# Allegro board EVAL-LTC7890-AZ-REVC.brd
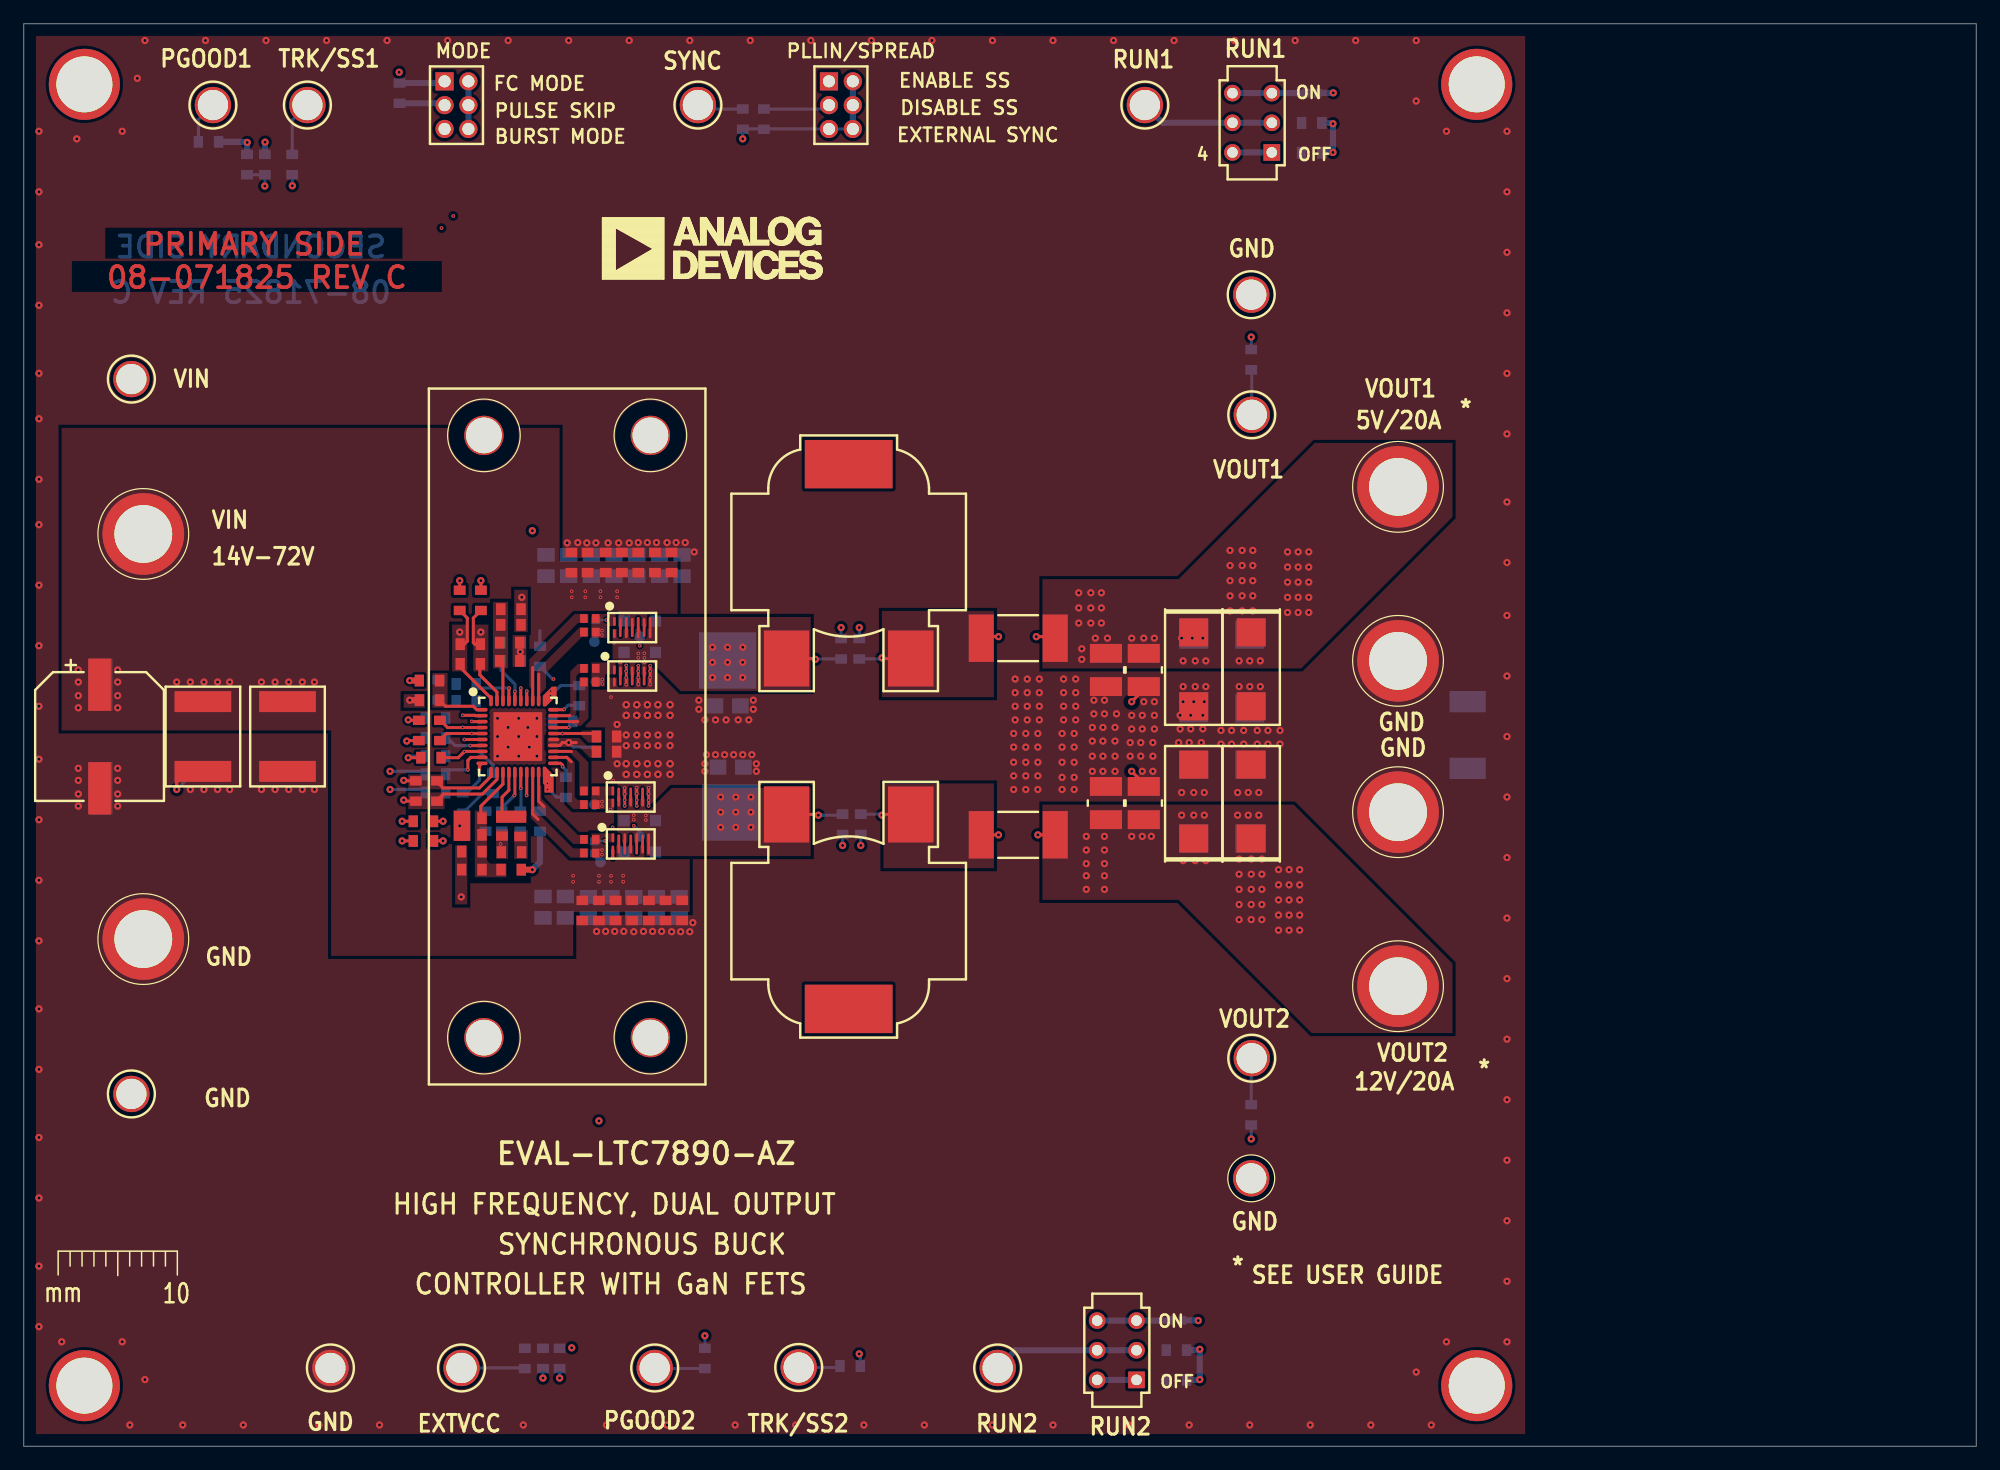
[diagram p0: board, top side]
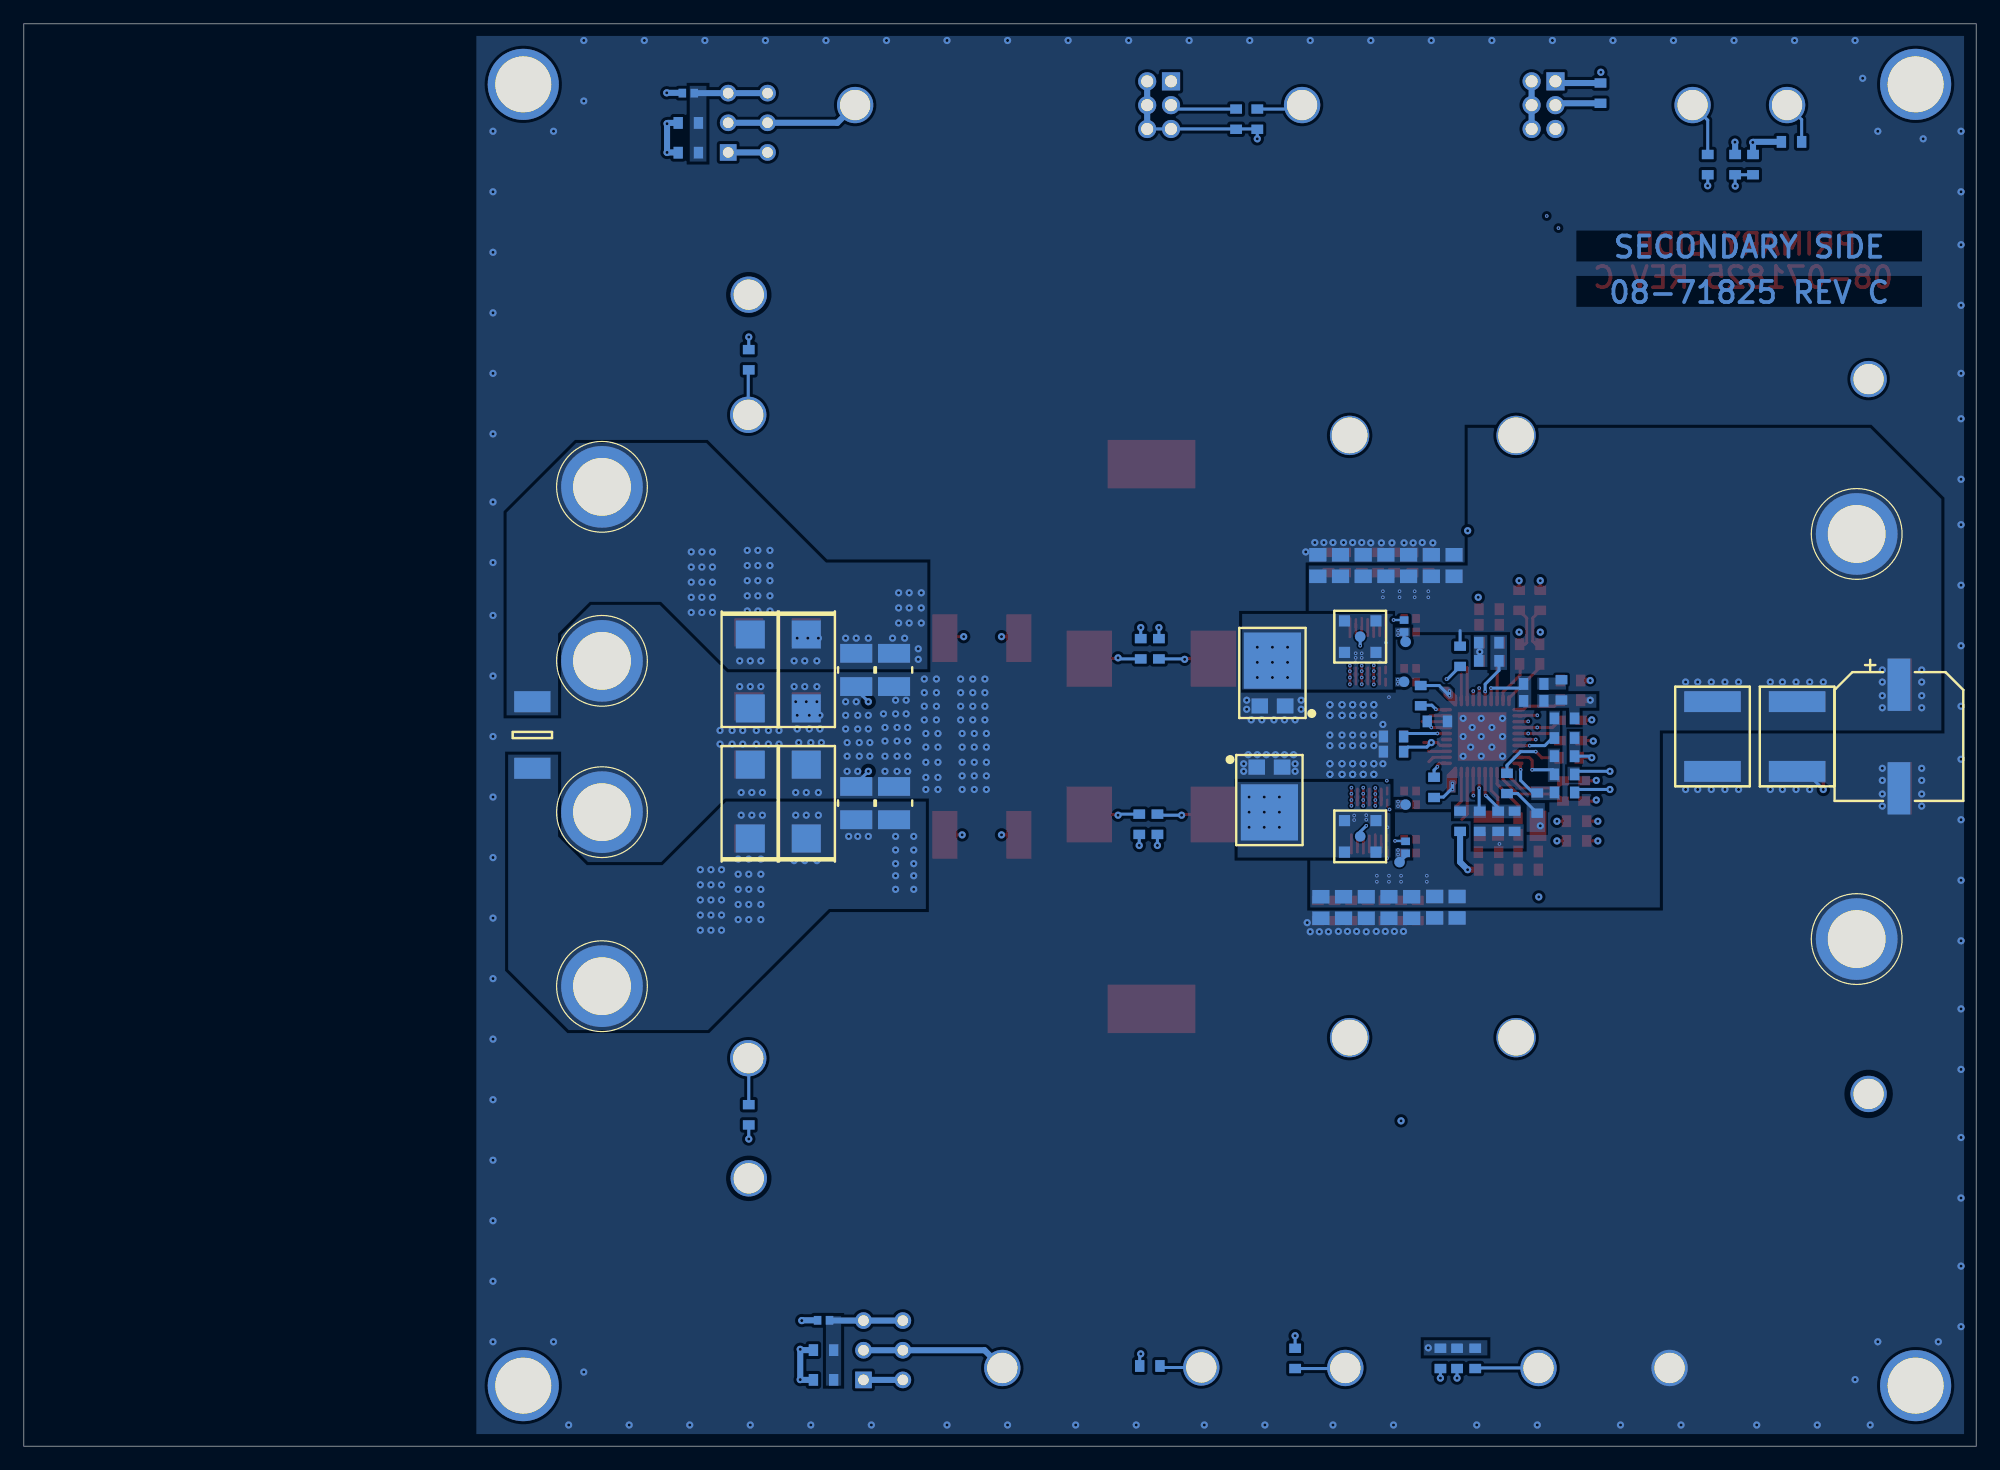
[diagram p1: board, bottom side, seen from below]

Outline 163.83 x 119.38 mm; copper layers: TOP, LAYER_2, LAYER_3, LAYER_4, LAYER_5, BOTTOM. Coordinates in mm from the lower left corner of the outline.
Outline path: 0,119.38 0,0 163.83,0 163.83,119.38 0,119.38

## Design rules (mm)
constraint set DEFAULT: min track width 0.254

## Placement (name value [footprint] x y rotation side)
C1  4.7uF  [C0603]  48.9 58.29 0 bottom
C2  0.1uF  [C0603]  48.9 58.29 0 top
C3  0.1uF  [C0603]  46.61 62.99 270 bottom
C4  0.1uF  [C0603]  45.49 55.3 270 bottom
C5  1000pF  [C0603]  34.67 54.99 90 top
C6  TBD0603  [C0603]  40.87 68.94 180 top
C7  1000pF  [C0603]  37.47 65.66 0 top
C8  TBD0603  [C0603]  40.77 65.91 0 top
C9  TBD0603  [C0603]  37.59 49.91 0 top
C10  100pF  [C0603]  37.12 62.55 0 bottom
C11  100pF  [C0603]  40.12 52.06 270 top
C12  3300pF  [C0603]  40.92 49.86 180 top
C13  TBD0603  [C0603]  37.59 52.71 180 top
C14  6800pF  [C0603]  37.12 63.98 0 bottom
C15  0.1uF  [C0603]  40.11 52.45 270 bottom
C16  TBD0603  [C0603]  62.1 111.38 90 bottom
C17  0.1uF  [C0603]  40.89 67.44 0 bottom
C20  100pF  [C0603]  96.72 5.56 180 bottom
C23  1uF  [C0603]  48.9 59.56 180 top
C24  100pF  [C0603]  108.07 108.56 180 bottom
C25  0.1uF  [C0603]  45.21 60.83 180 bottom
C26  0.22uF  [C0603]  46.86 44.96 270 top
C27  0.1uF  [C0603]  48.26 44.96 270 top
C28  0.22uF  [C0603]  49.66 44.96 270 top
C29  0.22uF  [C0603]  51.05 44.96 270 top
C30  0.22uF  [C0603]  52.45 44.96 270 top
C31  0.22uF  [C0603]  53.85 44.96 270 top
C32  0.22uF  [C0603]  55.24 44.96 270 top
C33  0.22uF  [C0603]  45.95 74.17 90 top
C34  0.22uF  [C0603]  47.31 74.17 90 top
C35  0.22uF  [C0603]  48.83 74.17 90 top
C36  0.22uF  [C0603]  50.19 74.17 90 top
C37  0.22uF  [C0603]  51.56 74.17 90 top
C38  0.22uF  [C0603]  52.96 74.17 90 top
C39  0.22uF  [C0603]  54.36 74.17 90 top
CIN1  56UF  [CPLSMSQ406H500]  6.35 59.56 270 top
CIN2  56UF  [CPLSMSQ406H500]  6.48 59.56 270 bottom
CIN3  22uF  [CAPSML256W217H217]  15.03 59.56 270 top
CIN4  22uF  [CAPSML256W217H217]  22.13 59.56 270 top
CIN5  22uF  [CAPSML256W217H217]  15.03 59.56 270 bottom
CIN6  22uF  [CAPSML256W217H217]  22.13 59.56 270 bottom
CIN7  TBD0805  [C0805]  43.56 45.24 270 bottom
CIN8  TBD0805  [C0805]  45.44 45.24 270 bottom
CIN9  1uF  [C0805]  47.37 45.21 270 bottom
CIN10  1uF  [C0805]  49.28 45.21 270 bottom
CIN11  1uF  [C0805]  51.18 45.21 270 bottom
CIN12  TBD0805  [C0805]  53.09 45.21 270 bottom
CIN13  TBD0805  [C0805]  54.99 45.21 270 bottom
CIN14  TBD0805  [C0805]  43.81 73.91 90 bottom
CIN15  TBD0805  [C0805]  45.72 73.91 90 bottom
CIN16  1uF  [C0805]  47.62 73.91 90 bottom
CIN17  1uF  [C0805]  49.53 73.91 90 bottom
CIN18  1uF  [C0805]  51.44 73.91 90 bottom
CIN19  TBD0805  [C0805]  53.34 73.91 90 bottom
CIN20  TBD0805  [C0805]  55.24 73.91 90 bottom
COUT1  22uF  [C1210-2]  90.81 65.15 270 top
COUT2  22uF  [C1210-2]  93.98 65.15 270 top
COUT3  150UF  [C7343-31]  98.17 65.2 270 top
COUT4  150UF  [C7343-31]  103 65.2 270 top
COUT5  22uF  [C1210-2]  90.81 53.98 90 top
COUT6  22uF  [C1210-2]  93.98 53.98 90 top
COUT7  150UF  [C7343-31]  98.17 54.1 90 top
COUT8  150UF  [C7343-31]  103 54.1 90 top
COUT9  150UF  [C7343-31]  98.17 65.02 270 bottom
COUT10  150UF  [C7343-31]  102.87 65.02 270 bottom
COUT11  22uF  [C1210-2]  93.98 65.15 270 bottom
COUT12  22uF  [C1210-2]  90.81 65.15 270 bottom
COUT13  150UF  [C7343-31]  98.17 54.1 90 bottom
COUT14  22uF  [C1210-2]  93.98 53.98 90 bottom
COUT15  150UF  [C7343-31]  102.87 54.1 90 bottom
COUT18  22uF  [C1210-2]  90.81 53.98 90 bottom
D1  SS10PH10-M3/86A  [TO-277A]  59.05 64.9 90 bottom
D2  SS10PH10-M3/86A  [TO-277A]  59.31 54.23 270 bottom
E1  2501-2-00-80-00-00-07-0  [CNMILLMAX2501]  52.94 6.56 0 top
E2  2501-2-00-80-00-00-07-0  [CNMILLMAX2501]  15.87 112.56 0 top
E3  2501-2-00-80-00-00-07-0  [CNMILLMAX2501]  9.03 89.56 0 top
E4  2501-2-00-80-00-00-07-0  [CNMILLMAX2501]  9.03 29.56 0 top
E5  2501-2-00-80-00-00-07-0  [CNMILLMAX2501]  103.04 32.56 0 top
E6  2501-2-00-80-00-00-07-0  [CNMILLMAX2501]  103.04 86.56 270 top
E7  2501-2-00-80-00-00-07-0  [CNMILLMAX2501]  103 22.48 0 top
E8  2501-2-00-80-00-00-07-0  [CNMILLMAX2501]  103 96.65 270 top
E9  2501-2-00-80-00-00-07-0  [CNMILLMAX2501]  65.02 6.6 0 top
E10  2501-2-00-80-00-00-07-0  [CNMILLMAX2501]  56.57 112.56 0 top
E11  2501-2-00-80-00-00-07-0  [CNMILLMAX2501]  23.8 112.56 0 top
E12  2501-2-00-80-00-00-07-0  [CNMILLMAX2501]  36.73 6.56 0 top
E13  2501-2-00-80-00-00-07-0  [CNMILLMAX2501]  25.73 6.56 0 top
E16  2501-2-00-80-00-00-07-0  [CNMILLMAX2501]  94.07 112.56 180 top
E17  2501-2-00-80-00-00-07-0  [CNMILLMAX2501]  81.72 6.56 0 top
J1  KFH-032-10ET  [CNPEMKFH-032]  10.03 76.56 0 top
J2  KFH-032-10ET  [CNPEMKFH-032]  10.03 42.56 0 top
J3  KFH-032-10ET  [CNPEMKFH-032]  115.32 38.61 0 top
J4  KFH-032-10ET  [CNPEMKFH-032]  115.32 53.21 0 top
J5  KFH-032-10ET  [CNPEMKFH-032]  115.32 80.52 270 top
J6  KFH-032-10ET  [CNPEMKFH-032]  115.32 65.91 270 top
J10  0734152063  [CNSMASQ136H203]  51.69 67.95 180 bottom
J11  0734152063  [CNSMASQ136H203]  51.69 51.18 180 bottom
L1  2UH  [LSML755W365H420]  69.22 75.06 0 top
L2  2UH  [LSML755W365H420]  69.22 44.07 180 top
NOREF  -  [unnamed]  5.08 114.3 0 top
NOREF#2  -  [#2]  81.15 139.7 0 top
NOREF#3  -  [#2]  212.09 315.59 0 top
NOREF#4  -  [#2]  140.21 305.56 0 top
NOREF#5  -  [unnamed]  121.92 114.3 0 top
NOREF#6  -  [#2]  307.98 172.97 0 top
NOREF#7  -  [#2]  0.89 95.02 270 top
NOREF#8  -  [unnamed]  5.08 5.08 0 top
NOREF#9  -  [#2]  0 0 0 top
NOREF#10  -  [#2]  -49.02 -68.07 0 top
NOREF#11  -  [#2]  78.19 123.69 0 top
NOREF#12  -  [#2]  15.37 -21.46 0 top
NOREF#13  -  [#2]  -124.71 -186.82 0 top
NOREF#14  -  [#2]  300.95 236.48 0 top
NOREF#15  -  [#2]  -12.57 115.44 0 top
NOREF#16  -  [#2]  0 0 90 top
NOREF#17  -  [#2]  131.93 308.2 0 top
NOREF#18  -  [#2]  150.24 -6.98 0 top
NOREF#19  -  [#2]  34.11 -27.73 0 top
NOREF#20  -  [#2]  -165.25 -186.59 0 top
NOREF#21  -  [#2]  159.77 116.01 0 top
NOREF#22  -  [unnamed]  121.92 5.08 0 top
P1  TMM-103-02-L-D  [CNTHMHDR2X3L236W155H225]  35.31 114.55 270 top
P3  TMM-103-02-L-D  [CNTHMHDR2X3L236W155H225]  67.56 114.55 270 top
P10  9774010243R  [CNWURTH9774010243R]  52.58 84.84 0 top
P11  9774010243R  [CNWURTH9774010243R]  38.61 84.84 0 top
P12  9774010243R  [CNWURTH9774010243R]  52.58 34.29 0 top
P13  9774010243R  [CNWURTH9774010243R]  38.61 34.29 0 top
Q1  EPC2218  [DIE8_3_5X1_95_A]  51.05 68.71 0 top
Q2  EPC2218  [DIE8_3_5X1_95_A]  51.05 64.64 0 top
Q3  EPC2218  [DIE8_3_5X1_95_A]  50.92 54.48 0 top
Q4  EPC2218  [DIE8_3_5X1_95_A]  50.93 50.55 0 top
R1  1MEG  [R0603]  57.15 7.37 270 bottom
R2  0  [R0603]  43.31 66.29 270 bottom
R3  0  [R0603]  39.37 55.63 270 bottom
R5  1MEG  [R0603]  15.49 109.47 180 bottom
R6  1.2  [R0402]  47.5 69.47 180 top
R7  2.2  [R0402]  47.5 49.78 0 top
R8  1  [R0402]  47.5 68.33 180 top
R9  1  [R0402]  47.5 50.93 0 top
R10  TBD0402  [R0402]  48.01 68.83 90 bottom
R12  10  [R0603]  103 27.81 270 bottom
R13  1  [R0402]  47.5 64.14 180 top
R14  1  [R0402]  47.5 54.99 0 top
R15  1  [R0402]  47.5 65.28 180 top
R16  1  [R0402]  47.5 53.85 0 top
R17  10  [R0603]  103 91.19 90 bottom
R18  0  [R0603]  40.87 70.24 180 top
R19  TBD0603  [R0603]  40.77 67.44 0 top
R20  3.01K  [R0603]  34.8 63.48 90 bottom
R21  5.9K  [R0603]  41.66 52.02 270 top
R22  TBD0603  [R0603]  40.89 48.39 0 top
R23  1.4MEG  [R0603]  37.59 48.39 0 top
R24  10  [R0603]  33.53 50.8 0 top
R25  0  [R0603]  33.53 52.45 0 top
R26  TBD0603  [R0603]  68.71 52.2 270 bottom
R27  TBD0603  [R0603]  70.23 52.2 270 bottom
R28  0  [R0603]  36.58 70.99 270 top
R29  20  [R0603]  38.35 70.99 270 top
R30  TBD0603  [R0603]  70.1 66.93 90 bottom
R31  TBD0603  [R0603]  68.58 66.93 90 bottom
R32  100K  [R0603]  37.59 51.31 180 top
R33  TBD0603  [R0603]  32.89 54.99 90 top
R34  TBD0603  [R0603]  37.47 67.31 180 top
R36  0  [R0603]  34.54 57.91 180 bottom
R37  75K  [R0603]  34.04 62.61 0 top
R38  TBD0603  [R0603]  34.04 64.26 180 top
R39  TBD0402  [R0402]  47.88 50.27 90 bottom
R40  TBD0603  [R0603]  34.54 56.39 180 bottom
R41  0  [R0603]  34.54 54.86 180 bottom
R42  TBD0603  [R0603]  36.83 53.98 270 bottom
R43  0  [R0603]  20.23 107.56 90 bottom
R45  TBD0603  [R0603]  34.16 57.79 180 top
R46  TBD0603  [R0603]  48.9 59.56 0 bottom
R47  TBD0603  [R0603]  34.54 59.44 180 bottom
R48  0  [R0603]  34.54 61.09 180 bottom
R49  1K  [R0603]  60.33 111.38 270 bottom
R50  0  [R0603]  69.34 6.73 180 bottom
R51  TBD0603  [R0603]  38.73 52.45 270 bottom
R52  0  [R0603]  22.53 107.56 270 bottom
R53  TBD0603  [R0603]  40.89 65.91 0 bottom
R56  1MEG  [R0402]  96.72 10.56 0 bottom
R57  100K  [R0603]  31.53 113.56 270 bottom
R58  TBD0603  [R0603]  96.72 8.06 0 bottom
R59  0  [R0603]  43.56 7.37 90 bottom
R60  TBD0603  [R0603]  44.96 7.37 90 bottom
R61  TBD0603  [R0603]  42.04 7.37 270 bottom
R62  1MEG  [R0402]  108.07 113.56 180 bottom
R63  TBD0603  [R0603]  108.07 111.06 0 bottom
R66  TBD0603  [R0603]  34.92 60.07 270 top
R67  TBD_SPACER_2512  [R2512]  121.16 59.69 270 bottom
R68  TBD0603  [R0603]  33.15 60.07 270 top
R71  TBD0603  [R0603]  43.31 52.45 90 bottom
R72  TBD0603  [R0603]  41.66 52.45 90 bottom
R74  TBD0603  [R0603]  18.73 107.56 90 bottom
RS1  0.0015  [R2512H35]  83.44 67.82 180 top
RS2  0.0015  [R2512H35]  83.44 51.31 0 top
S1  JS202011CQN  [SWTHL354W142H217]  104.72 108.59 90 top
S2  JS202011CQN  [SWTHL354W142H217]  93.37 5.56 90 top
TP1  TESTPAD  [TPSMC40]  48.01 64.16 180 bottom
TP2  TESTPAD  [TPSMC40]  47.88 67.51 180 bottom
TP3  TESTPAD  [TPSMC40]  48.39 49.02 180 bottom
TP4  TESTPAD  [TPSMC40]  47.88 53.85 180 bottom
U1  LTC7890RUJM#PBF  [QFN40_6X6_PAD4_1X4_1_05-08-1681]  41.45 59.56 270 top

## Library data of the parts
C1 = CAP: Tolerance: 10; User Part Number: UPN; alternate symbols: (C0603); part number: CAP_SM-4.7UF,25V,10,E035948,C0603; tolerance: 10
C2-C4 C15 C17 = CAP: Tolerance: 10; User Part Number: UPN; alternate symbols: (C0603); part number: CAP_SM-0.1UF,25V,10,E013746,C0603; tolerance: 10
C5 C7 = CAP: Tolerance: 10; User Part Number: UPN; alternate symbols: (C0603); part number: CAP_SM-1000PF,25V,10,E042649,C0603; tolerance: 10
C6 C8 C9 C13 C16 = CAP: User Part Number: UPN; alternate symbols: (C0603); part number: CAP_SM-TBD0603,TBD0603,TBD0603,E000382,C0603
C10 C20 C24 = CAP: Tolerance: 10; User Part Number: UPN; alternate symbols: (C0603); part number: CAP_SM-100PF,50V,10,E024743,C0603; tolerance: 10
C11 = CAP: Tolerance: 10; User Part Number: UPN; alternate symbols: (C0603); part number: CAP_SM-100PF,50V,10,E013802,C0603; tolerance: 10
C12 = CAP: Tolerance: 10; User Part Number: UPN; alternate symbols: (C0603); part number: CAP_SM-3300PF,50V,10,E019647,C0603; tolerance: 10
C14 = CAP: Tolerance: 10; User Part Number: UPN; alternate symbols: (C0603); part number: CAP_SM-6800PF,50V,10,E007966,C0603; tolerance: 10
C23 = CAP: Tolerance: 10; User Part Number: UPN; alternate symbols: (C0603); part number: CAP_SM-1UF,25V,10,E033832,C0603; tolerance: 10
C25 C27 = CAP: Tolerance: 10; User Part Number: UPN; alternate symbols: (C0603); part number: CAP_SM-0.1UF,100V,10,E024908,C0603; tolerance: 10
C26 C28-C39 = CAP: Tolerance: 10; User Part Number: UPN; alternate symbols: (C0603); part number: CAP_SM-0.22UF,100V,10,E031432,C0603; tolerance: 10
CIN1 CIN2 = CAPP: Tolerance: 20; User Part Number: UPN; alternate symbols: (CPLSMSQ406H500); part number: CAPP_SM-56UF,80V,20,E062303,CPLSMSQ406H500; tolerance: 20
CIN3-CIN6 = CAP: Tolerance: 20; User Part Number: UPN; alternate symbols: (CAPSML256W217H217); part number: CAP_SM-22UF,100V,20,E026779,CAPSML256W217H217; tolerance: 20
CIN7 CIN8 CIN12-CIN15 CIN19 CIN20 = CAP: User Part Number: UPN; alternate symbols: (C0805); part number: CAP_SM-TBD0805,TBD0805,TBD0805,E000383,C0805
CIN9-CIN11 CIN16-CIN18 = CAP: User Part Number: UPN; Tolerance: 10; alternate symbols: (C0805); part number: CAP_SM-1UF,100V,10,E014208,C0805; tolerance: 10
COUT1 COUT2 COUT5 COUT6 COUT11 COUT12 COUT14 COUT18 = CAP: Tolerance: 10; User Part Number: UPN; alternate symbols: (C1210-2); part number: CAP_SM-22UF,16V,10,E011548,C1210-2; tolerance: 10
COUT3 COUT4 COUT7-COUT10 COUT13 COUT15 = CAPP: Tolerance: 20; User Part Number: UPN; alternate symbols: (C7343-31); part number: CAPP_SM-150UF,16V,20,E046068,C7343-31; tolerance: 20
D1 D2 = DIO3P_V7: User Part Number: UPN; Tolerance: N/A; alternate symbols: (TO-277A); part number: DIO3P_V7_SM-SS10PH10-M3/86A,100V,N/A,E057759,TO-277A; tolerance: N/A
E1-E13 E16 E17 = CNTP1P: User Part Number: UPN; Tolerance: N/A; alternate symbols: (CNMILLMAX2501); part number: CNTP1P_TH-2501-2-00-80-00-00-07-0,E031108,CNMILLMAX2501; tolerance: N/A
J1-J6 = CN1P: User Part Number: UPN; Tolerance: N/A; alternate symbols: (CNPEMKFH-032); part number: CN1P_TH-KFH-032-10ET,E039893,CNPEMKFH-032; tolerance: N/A
J10 J11 = CNBNC5P: Tolerance: N/A; User Part Number: UPN; alternate symbols: (CNSMASQ136H203); part number: CNBNC5P_SM-0734152063,E050157,CNSMASQ136H203; tolerance: N/A
L1 L2 = IND: User Part Number: UPN; Tolerance: 20; alternate symbols: (LSML755W365H420); part number: IND_SM-2UH,20,E047808,LSML755W365H420; tolerance: 20
P1 P3 = CN6P_ODD_EVEN: User Part Number: UPN; Tolerance: N/A; alternate symbols: (CNTHMHDR2X3L236W155H225); part number: CN6P_ODD_EVEN_TH-TMM-103-02-L-D,E043044,CNTHMHDR2X3L236W155H225; tolerance: N/A
P10-P13 = CN1P: Tolerance: N/A; User Part Number: UPN; alternate symbols: (CNWURTH9774010243R); part number: CN1P_TH-9774010243R,E060235,CNWURTH9774010243R; tolerance: N/A
Q1-Q4 = TRANNGANFET8P: Tolerance: N/A; User Part Number: UPN; alternate symbols: (DIE8_3_5X1_95_A); part number: TRANNGANFET8P_SM-EPC2218,E058016,DIE8_3_5X1_95_A; tolerance: N/A
R1 R5 = RES: User Part Number: UPN; Tolerance: 5; alternate symbols: (R0603); part number: RES_SM-1MEG,E027219,1/10W,5,R0603; tolerance: 5
R2 R3 R18 R25 R28 R36 R41 R43 R48 R50 R52 R59 = RES: User Part Number: UPN; Tolerance: JUMPER; alternate symbols: (R0603); part number: RES_SM-0,E007502,1/10W,JUMPER,R0603; tolerance: JUMPER
R6 = RES: User Part Number: UPN; Tolerance: 1; alternate symbols: (R0402); part number: RES_SM-1.2,E041546,1/16W,1,R0402; tolerance: 1
R7 = RES: User Part Number: UPN; Tolerance: 5; alternate symbols: (R0402); part number: RES_SM-2.2,E045373,1/16W,5,R0402; tolerance: 5
R8 R9 R13-R16 = RES: User Part Number: UPN; Tolerance: 5; alternate symbols: (R0402); part number: RES_SM-1,E019639,1/16W,5,R0402; tolerance: 5
R10 R39 = RES: User Part Number: UPN; alternate symbols: (R0402); part number: RES_SM-TBD0402,E004049,TBD0402,TBD0402,R0402
R12 = RES: User Part Number: UPN; Tolerance: 1; alternate symbols: (R0603); part number: RES_SM-10,E030868,1/10W,1,R0603; tolerance: 1
R17 R24 = RES: User Part Number: UPN; Tolerance: 1; alternate symbols: (R0603); part number: RES_SM-10,E003666,1/10W,1,R0603; tolerance: 1
R19 R22 R26 R27 R30 R31 R33 R34 R38 R40 R42 R45-R47 R51 R53 R58 R60 R61 R63 R66 R68 R71 R72 R74 = RES: User Part Number: UPN; alternate symbols: (R0603); part number: RES_SM-TBD0603,E004050,TBD0603,TBD0603,R0603
R20 = RES: User Part Number: UPN; Tolerance: 0.1; alternate symbols: (R0603); part number: RES_SM-3.01K,E019212,1/16W,0.1,R0603; tolerance: 0.1
R21 = RES: User Part Number: UPN; Tolerance: 1; alternate symbols: (R0603); part number: RES_SM-5.9K,E028374,1/10W,1,R0603; tolerance: 1
R23 = RES: User Part Number: UPN; Tolerance: 1; alternate symbols: (R0603); part number: RES_SM-1.4MEG,E024301,1/10W,1,R0603; tolerance: 1
R29 = RES: User Part Number: UPN; Tolerance: 1; alternate symbols: (R0603); part number: RES_SM-20,E032358,1/10W,1,R0603; tolerance: 1
R32 = RES: User Part Number: UPN; Tolerance: 1; alternate symbols: (R0603); part number: RES_SM-100K,E030871,1/10W,1,R0603; tolerance: 1
R37 = RES: User Part Number: UPN; Tolerance: 1; alternate symbols: (R0603); part number: RES_SM-75K,E012707,1/10W,1,R0603; tolerance: 1
R49 = RES: User Part Number: UPN; Tolerance: 1; alternate symbols: (R0603); part number: RES_SM-1K,E003678,1/10W,1,R0603; tolerance: 1
R56 R62 = RES: User Part Number: UPN; Tolerance: 1; alternate symbols: (R0402); part number: RES_SM-1MEG,E003749,1/10W,1,R0402; tolerance: 1
R57 = RES: User Part Number: UPN; Tolerance: 1; alternate symbols: (R0603); part number: RES_SM-100K,E010279,1/10W,1,R0603; tolerance: 1
R67 = RES: Tolerance: N/A; User Part Number: UPN; alternate symbols: (R2512); part number: RES_SM-TBD_SPACER_2512,E011817,N/A,N/A,R2512; tolerance: N/A
RS1 RS2 = RES: User Part Number: UPN; Tolerance: 1; alternate symbols: (R2512H35); part number: RES_SM-0.0015,E047480,3W,1,R2512H35; tolerance: 1
S1 S2 = SWDPDT_V5: Tolerance: N/A; User Part Number: UPN; alternate symbols: (SWTHL354W142H217); part number: SWDPDT_V5_TH-JS202011CQN,E025828,SWTHL354W142H217; tolerance: N/A
TP1-TP4 = NCTESTPAD: Tolerance: N/A; User Part Number: UPN; alternate symbols: (TPSMC40); part number: NCTESTPAD_SM-TESTPAD,E019801,TPSMC40; tolerance: N/A
U1 = ADLTC7890: User Part Number: UPN; Tolerance: N/A; alternate symbols: (QFN40_6X6_PAD4_1X4_1_05-08-1681); part number: ADLTC7890_SM-LTC7890RUJM#PBF,E057724,QFN40_6X6_PAD4_1X4_1_05-08-1681; tolerance: N/A

## Footprints (pads in the part's own frame, mm; a bottom-side part is the same pattern mirrored in y, then rotated)
C0603
  rect 0.787x0.991 smd: 1(-0.85,0) 2(0.85,0)
C0805
  rect 1.143x1.448 smd: 1(-0.9,0) 2(0.9,0)
C1210-2
  rect 1.575x2.692 smd: 1(-1.397,0) 2(1.397,0)
C7343-31
  rect 2.362x2.438 smd: N(3.1,0) P(-3.1,0)
CAPSML256W217H217
  rect 1.753x4.75 smd: 1(-2.926,0) 2(2.926,0)
CNMILLMAX2501
  round 3.048 hole 2.54: 1(0,0)
CNPEMKFH-032
  round 6.858 hole 4.851: 1(0,0)
CNSMASQ136H203
  round 0.889 smd: 1(0,0)
  rect 0.94x0.94 smd: 2(-1.32,-1.32) 3(1.32,-1.32) 4(1.32,1.32) 5(-1.32,1.32)
CNTHMHDR2X3L236W155H225
  rect 1.524x1.524 hole 1.016: 1(0,0)
  round 1.524 hole 1.016: 2(0,2) 3(2,0) 4(2,2) 5(4,0) 6(4,2)
CNWURTH9774010243R
  round 3.302 hole 2.997 unplated: (0,0)
  round 0 smd: 1(0,0)
CPLSMSQ406H500
  rect 4.394x1.905 smd: N(4.347,0) P(-4.347,0)
DIE8_3_5X1_95_A
  oval 0.229x0.762 smd: 1(-1.5,0.513) 2(-1.5,-0.513)
  oval 0.229x1.6 smd: 3(-1,0) 5(0,0) 7(1,0)
  oval 0.229x1.778 smd: 4(-0.5,0) 6(0.5,0) 8(1.5,0)
LSML755W365H420
  rect 7.366x4.064 smd: (0,7.366)
  rect 3.81x4.699 smd: 1(-5.207,-8.954) 2(5.207,-8.954)
QFN40_6X6_PAD4_1X4_1_05-08-1681
  oval 0.305x0.94 smd: 1(-2.25,-3.005) 2(-1.75,-3.005) 3(-1.25,-3.005) 4(-0.75,-3.005) 5(-0.25,-3.005) 6(0.25,-3.005) 7(0.75,-3.005) 8(1.25,-3.005) 9(1.75,-3.005) 10(2.25,-3.005) 21(2.25,3.005) 22(1.75,3.005) 23(1.25,3.005) 24(0.75,3.005) 25(0.25,3.005) 26(-0.25,3.005) 27(-0.75,3.005) 28(-1.25,3.005) 29(-1.75,3.005) 30(-2.25,3.005)
  oval 0.94x0.305 smd: 11(3.005,-2.25) 12(3.005,-1.75) 13(3.005,-1.25) 14(3.005,-0.75) 15(3.005,-0.25) 16(3.005,0.25) 17(3.005,0.75) 18(3.005,1.25) 19(3.005,1.75) 20(3.005,2.25) 31(-3.005,2.25) 32(-3.005,1.75) 33(-3.005,1.25) 34(-3.005,0.75) 35(-3.005,0.25) 36(-3.005,-0.25) 37(-3.005,-0.75) 38(-3.005,-1.25) 39(-3.005,-1.75) 40(-3.005,-2.25)
  rect 4.089x4.089 smd: 41(0,0)
R0402
  rect 0.635x0.737 smd: 1(-0.5,0) 2(0.5,0)
R0603
  rect 0.787x0.991 smd: 1(-0.85,0) 2(0.85,0)
R2512
  rect 1.778x3.048 smd: 1(-2.794,0) 2(2.794,0)
R2512H35
  rect 2.108x3.988 smd: 1(-3.104,0) 2(3.104,0)
SWTHL354W142H217
  rect 1.397x1.397 hole 0.889: 1(0,0)
  round 1.397 hole 0.889: 2(2.489,0) 3(4.978,0) 4(0,3.302) 5(2.489,3.302) 6(4.978,3.302)
TO-277A
  rect 1.27x1.397 smd: 1(-2.765,-1.065) 2(-2.765,1.065)
  rect 4.724x4.801 smd: 3(1.038,0)
TPSMC40
  round 0.889 smd: 1(0,0)
unnamed
  round 5.969 hole 4.699 unplated: (0,0)

## Nets
GND_POWER: C1.2(N2) C2.2(N2) C23.1 C25.2(N2) C26.2(N2) C27.2(N2) C28.2(N2) C29.2(N2) C30.2(N2) C31.2(N2) C32.2(N2) C33.2(N2) C34.2(N2) C35.2(N2) C36.2(N2) C37.2(N2) C38.2(N2) C39.2(N2) CIN1.N(N2) CIN2.N(N2) CIN3.2(N2) CIN4.2(N2) CIN5.2(N2) CIN6.2(N2) CIN7.2(N2) CIN8.2(N2) CIN9.2(N2) CIN10.2(N2) CIN11.2(N2) CIN12.2(N2) CIN13.2(N2) CIN14.2(N2) CIN15.2(N2) CIN16.2(N2) CIN17.2(N2) CIN18.2(N2) CIN19.2(N2) CIN20.2(N2) COUT1.2(N2) COUT2.2(N2) COUT3.N(N2) COUT4.N(N2) COUT5.2(N2) COUT6.2(N2) COUT7.N(N2) COUT8.N(N2) COUT9.N(N2) COUT10.N(N2) COUT11.2(N2) COUT12.2(N2) COUT13.N(N2) COUT14.2(N2) COUT15.N(N2) COUT18.2(N2) D1.1 D1.2 D2.1 D2.2 E4.1(N1) E7.1(N1) E8.1(N1) E13.1(N1) J2.1(N1) J4.1(N1) J6.1(N1) Q2.2 Q2.4 Q2.6 Q2.8(S4) Q3.2 Q3.4 Q3.6 Q3.8(S4) R46.2(N2) U1.41
GND_SIGNAL: C8.2(N2) C10.1 C11.2(N2) C12.2(N2) C13.2(N2) C15.2(N2) C16.2(N2) C17.2(N2) C20.1 C24.1 P1.5 P3.3 R3.2(N2) R19.2(N2) R20.1 R32.2(N2) R37.1 R40.2(N2) R42.2(N2) R43.2(N2) R48.2(N2) R51.2(N2) R53.2(N2) R58.2(N2) R63.2(N2) R72.1 S1.1 S1.4 S2.1 S2.4 U1.6
VIN: C26.1 C27.1 C28.1 C29.1 C30.1 C31.1 C32.1 C33.1 C34.1 C35.1 C36.1 C37.1 C38.1 C39.1 CIN1.P CIN2.P CIN3.1 CIN4.1 CIN5.1 CIN6.1 CIN7.1 CIN8.1 CIN9.1 CIN10.1 CIN11.1 CIN12.1 CIN13.1 CIN14.1 CIN15.1 CIN16.1 CIN17.1 CIN18.1 CIN19.1 CIN20.1 E3.1(N1) J1.1(N1) Q1.3 Q1.5 Q1.7 Q4.3 Q4.5 Q4.7 R2.1 R56.2(N2) R62.1
EXTVCC: C23.2(N2) R46.1 R59.2(N2) R60.2(N2) R61.1 U1.26
INTVCC: C1.1 C2.1 P1.1 P3.1 R1.1 R5.1 R22.2(N2) R36.2(N2) R38.2(N2) R41.2(N2) R45.2(N2) R47.2(N2) R57.1 R71.1 R74.2(N2) U1.24 U1.25
PGOOD1: E2.1(N1) R5.2(N2) R68.1 U1.34
PGOOD2: E1.1(N1) R1.2(N2) R68.2(N2) U1.17
RUN1: E16.1(N1) R66.1 S1.2 S1.5 U1.4
RUN2: E17.1(N1) R66.2(N2) S2.2 S2.5 U1.5
SENSE1+: C7.2(N2) R29.2(N2) R31.2(N2) R34.1 U1.39
SENSE1-: C7.1 R28.2(N2) R30.2(N2) R34.2(N2) U1.40
SENSE2+: C5.1 R24.2(N2) R26.2(N2) R33.1 U1.12
SENSE2-: C5.2(N2) R25.2(N2) R27.2(N2) R33.2(N2) U1.11
UNNAMED_2_ADLTC7890_I172_BGDN1: R15.2(N2) U1.29
UNNAMED_2_ADLTC7890_I172_BGDN2: R16.1 U1.22
UNNAMED_2_ADLTC7890_I172_BGUP1: R13.2(N2) U1.28
UNNAMED_2_ADLTC7890_I172_BGUP2: R14.1 U1.23
UNNAMED_2_ADLTC7890_I172_BOOST1: C3.2(N2) U1.30
UNNAMED_2_ADLTC7890_I172_BOOST2: C4.1 U1.21
UNNAMED_2_ADLTC7890_I172_DRVSET: R3.1 R45.1 U1.8
UNNAMED_2_ADLTC7890_I172_DRVUV: R47.1 R48.1 U1.7
UNNAMED_2_ADLTC7890_I172_DTCA: R36.1 R40.1 U1.9
UNNAMED_2_ADLTC7890_I172_DTCB: R41.1 R42.1 U1.10
UNNAMED_2_ADLTC7890_I172_FREQ: R37.2(N2) R38.1 U1.1
UNNAMED_2_ADLTC7890_I172_ILIM: R71.2(N2) R72.2(N2) U1.16
UNNAMED_2_ADLTC7890_I172_ITH1: C10.2(N2) C14.2(N2) U1.37
UNNAMED_2_ADLTC7890_I172_ITH2: C11.1 R21.1 U1.14
UNNAMED_2_ADLTC7890_I172_MODE: P1.2 P1.4 P1.6(N6) U1.2
UNNAMED_2_ADLTC7890_I172_SW1: C3.1 D1.3(C) J10.2 J10.3 J10.4 J10.5(SH4) L1.1 Q1.2 Q1.4 Q1.6 Q1.8(S4) Q2.3 Q2.5 Q2.7 R31.1 U1.31
UNNAMED_2_ADLTC7890_I172_SW2: C4.2(N2) D2.3(C) J11.2 J11.3 J11.4 J11.5(SH4) L2.2(N2) Q3.3 Q3.5 Q3.7 Q4.2 Q4.4 Q4.6 Q4.8(S4) R26.1 U1.20
UNNAMED_2_ADLTC7890_I172_TGDN1: R8.2(N2) U1.32
UNNAMED_2_ADLTC7890_I172_TGDN2: R9.1 U1.19
UNNAMED_2_ADLTC7890_I172_TGUP1: R6.2(N2) U1.33
UNNAMED_2_ADLTC7890_I172_TGUP2: R7.1 U1.18
UNNAMED_2_ADLTC7890_I172_VIN: C25.1 R2.2(N2) U1.27
UNNAMED_2_ADLTC7890_I172_VPRG1: R43.1 R74.1 U1.35(VPRG1)
UNNAMED_2_CAP_I201_N1: C16.1 P3.2 P3.4 P3.5 P3.6(N6) R49.2(N2) U1.3
UNNAMED_2_CAP_I211_N1: C17.1 R52.2(N2) R53.1 U1.36
UNNAMED_2_CAP_I223_N2: C24.2(N2) R62.2(N2) R63.1 S1.3 S1.6(NO2)
UNNAMED_2_CAP_I271_N2: C20.2(N2) R56.1 R58.1 S2.3 S2.6(NO2)
UNNAMED_2_CAP_I275_N1: C15.1 R50.1 R51.1 U1.15
UNNAMED_2_CAP_I289_N1: C12.1 R21.2(N2)
UNNAMED_2_CAP_I483_N1: C14.1 R20.2(N2)
UNNAMED_2_CN6PODDEVEN_I358_N3: P1.3 R57.2(N2)
UNNAMED_2_CNBNC5P_I457_CNTR: J10.1 R10.2(N2)
UNNAMED_2_CNBNC5P_I458_CNTR: J11.1 R39.2(N2)
UNNAMED_2_CNTP1P_I84_N1: E10.1(N1) R49.1
UNNAMED_2_CNTP1P_I85_N1: E11.1(N1) R52.1
UNNAMED_2_CNTP1P_I261_N1: E12.1(N1) R61.2(N2)
UNNAMED_2_CNTP1P_I280_N1: E9.1(N1) R50.2(N2)
UNNAMED_2_IND_I133_N2: L1.2(N2) R29.1 R30.1 RS1.2(N2)
UNNAMED_2_IND_I299_N1: L2.1 R24.1 R27.1 RS2.1
UNNAMED_2_NCTESTPAD_I479_N1: Q1.1 R6.1 R8.1 R10.1 TP2.1(N1)
UNNAMED_2_NCTESTPAD_I480_N1: Q2.1 R13.1 R15.1 TP1.1(N1)
UNNAMED_2_NCTESTPAD_I481_N1: Q3.1 R14.2(N2) R16.2(N2) TP4.1(N1)
UNNAMED_2_NCTESTPAD_I482_N1: Q4.1 R7.2(N2) R9.2(N2) R39.1 TP3.1(N1)
VFB1: C6.2(N2) C8.1 R18.2(N2) R19.1 U1.38
VFB2: C9.2(N2) C13.1 R22.1 R23.2(N2) R32.1 U1.13
VOSP1: C6.1 E6.1(N1) R17.1 R18.1
VOSP2: C9.1 E5.1(N1) R12.1 R23.1
VOUT1: COUT1.1 COUT2.1 COUT3.P COUT4.P COUT9.P COUT10.P COUT11.1 COUT12.1 J5.1(N1) R17.2(N2) R28.1 R59.1 R67.1 RS1.1
VOUT2: COUT5.1 COUT6.1 COUT7.P COUT8.P COUT13.P COUT14.1 COUT15.P COUT18.1 J3.1(N1) R12.2(N2) R25.1 R60.1 R67.2(N2) RS2.2(N2)

Pads without a net: P10 1; P11 1; P12 1; P13 1

## Via types
v1: diameter 0.305, hole 0.152, TOP to BOTTOM, 96 vias
v2: diameter 0.61, hole 0.254, TOP to BOTTOM, 538 vias

## Routing (per net, layer and track width the routed paths; a pad name or vN(x,y) marks a point on that pad's centre or on a via; arc(x,y) is an arc through that point)
GND_POWER: length 122.1
  TOP w0.254: v2(92.96,56.64) 93.98,55.63 COUT6.2 ; COUT2.2 93.98,63.5 v2(92.96,62.48)
  TOP w0.305: CIN3.2 13.63,56.64 12.83,55.83 v2(12.83,55.12)
  LAYER_3 w0.508: 77.29,116.18 77.31,116.16
  LAYER_4 w0.254: 44.09,56.95 44.09,56.92 ; E8.1 103,94.87 92.28,84.15 92.28,63.04 92.84,62.48 v2(92.96,62.48) ; v2(92.96,56.64) 91.95,55.63 91.95,35.31 103,24.26 E7.1 ; 49.43,55.83 v1(49.45,55.85)
  LAYER_4 w0.305: E4.1 4.32,34.27 4.32,46.61 v2(12.83,55.12)
  BOTTOM w0.254: CIN3.2 14.35,56.64 v2(12.83,55.12) ; COUT6.2 93.98,55.63 v2(92.96,56.64) ; v2(92.96,62.48) 93.98,63.5 COUT2.2
  vias: v1(49.23,53.44) v1(49.28,62.87) v1(50.42,55.25) v1(50.42,54.74) v1(50.42,54.23) v1(50.42,53.75) v1(50.55,65.53) v1(50.55,65.05) v1(50.55,64.49) v1(50.55,63.93) v1(51.44,55.27) v1(51.44,54.76) v1(51.44,54.23) v1(51.44,53.75) v1(51.56,65.51) v1(51.56,65.05) v1(51.56,64.52) v1(51.56,63.96) v1(52.43,55.27) v1(52.43,54.76) v1(52.43,54.23) v1(52.43,53.75) v1(52.55,65.51) v1(52.55,65.05) v1(52.55,64.52) v1(52.55,63.96) v2(1.27,110.36) v2(1.27,105.28) v2(1.27,100.84) v2(1.27,95.76) v2(1.27,90.04) v2(1.27,86.23) v2(1.27,81.15) v2(1.27,77.34) v2(1.27,72.26) v2(1.27,67.18) v2(1.27,62.1) v2(1.27,57.66) v2(1.27,52.58) v2(1.27,47.5) v2(1.27,42.42) v2(1.27,36.7) v2(1.27,31.62) v2(1.27,25.91) v2(1.27,20.83) v2(1.27,15.11) v2(1.27,10.03) v2(3.17,8.76) v2(4.45,109.73) v2(4.57,56.9) v2(4.57,55.88) v2(4.57,54.74) v2(4.57,53.72) v2(7.87,56.9) v2(7.87,55.88) v2(7.87,54.74) v2(7.87,53.72) v2(8.26,110.36) v2(8.26,8.76) v2(8.89,1.78) v2(9.53,114.81) v2(10.16,117.98) v2(10.16,5.59) v2(13.34,1.78) v2(13.97,55.12) v2(15.11,55.12) v2(15.24,117.98) v2(16.26,55.12) v2(17.27,55.12) v2(18.41,1.78) v2(19.94,55.12) v2(20.32,117.98) v2(21.08,55.12) v2(22.23,55.12) v2(23.37,55.12) v2(24.38,55.12) v2(24.77,1.78) v2(25.4,117.98) v2(29.84,1.78) v2(30.48,117.98) v2(35.56,117.98) v2(36.83,1.78) v2(39.75,61.09) v2(39.75,59.56) v2(39.75,57.91) v2(40.64,117.98) v2(40.64,60.33) v2(40.64,58.67) v2(41.53,61.09) v2(41.53,59.56) v2(41.53,57.91) v2(41.91,1.78) v2(42.29,60.33) v2(42.42,58.67) v2(43.05,61.09) v2(43.05,59.56) v2(43.05,57.91) v2(45.59,75.82) v2(45.72,117.98) v2(46.48,75.84) v2(47.24,75.82) v2(48.01,75.82) v2(48.06,43.21) v2(48.82,43.21) v2(48.9,1.78) v2(49.02,75.82) v2(49.58,43.21) v2(49.78,60.58) v2(49.78,57.28) v2(49.91,75.82) v2(50.34,43.21) v2(50.55,62.23) v2(50.55,62.23) v2(50.55,61.34) v2(50.55,61.34) v2(50.55,59.69) v2(50.55,58.8) v2(50.55,57.28) v2(50.55,57.28) v2(50.55,56.39) v2(50.55,56.39) v2(50.8,117.98) v2(50.8,75.82) v2(51.18,43.18) v2(51.44,62.23) v2(51.44,62.23) v2(51.44,61.34) v2(51.44,61.34) v2(51.44,59.69) v2(51.44,58.8) v2(51.44,57.28) v2(51.44,57.28) v2(51.44,56.39) v2(51.44,56.39) v2(51.56,75.84) v2(51.99,43.21) v2(52.32,75.84) v2(52.32,62.23) v2(52.32,62.23) v2(52.32,61.34) v2(52.32,61.34) v2(52.32,59.69) v2(52.32,58.8) v2(52.32,57.28) v2(52.32,57.28) v2(52.32,56.39) v2(52.32,56.39) v2(52.76,43.21) v2(53.09,75.84) v2(53.21,62.23) v2(53.21,62.23) v2(53.21,61.34) v2(53.21,61.34) v2(53.21,59.69) v2(53.21,58.8) v2(53.21,57.28) v2(53.21,57.28) v2(53.21,56.39) v2(53.21,56.39) v2(53.52,43.21) v2(53.98,75.84) v2(53.98,1.78) v2(54.23,62.23) v2(54.23,62.23) v2(54.23,61.34) v2(54.23,61.34) v2(54.23,59.69) v2(54.23,58.8) v2(54.23,57.28) v2(54.23,57.28) v2(54.23,56.39) v2(54.23,56.39) v2(54.36,43.18) v2(54.74,75.84) v2(55.12,43.18) v2(55.5,75.84) v2(55.88,117.98) v2(55.88,43.18) v2(56.13,43.94) v2(56.26,75.06) v2(56.64,62.61) v2(56.64,61.85) v2(57.15,60.96) v2(57.15,57.28) v2(57.15,56.64) v2(57.28,58.04) v2(58.04,60.96) v2(58.04,58.04) v2(58.8,58.04) v2(58.93,60.96) v2(59.56,58.04) v2(59.69,1.78) v2(59.94,60.96) v2(60.33,58.04) v2(60.83,60.96) v2(60.96,117.98) v2(61.09,58.04) v2(61.21,62.61) v2(61.21,61.85) v2(61.47,57.28) v2(61.47,56.64) v2(64.77,1.78) v2(66.04,117.98) v2(70.48,1.78) v2(71.12,117.98) v2(75.56,1.78) v2(76.2,117.98) v2(81.28,117.98) v2(81.28,1.78) v2(83.06,59.82) v2(83.06,58.67) v2(83.06,57.4) v2(83.06,56.26) v2(83.06,55.12) v2(83.19,64.39) v2(83.19,63.25) v2(83.19,62.1) v2(83.19,60.96) v2(84.07,59.82) v2(84.07,58.67) v2(84.07,57.4) v2(84.07,56.26) v2(84.07,55.12) v2(84.2,64.39) v2(84.2,63.25) v2(84.2,62.1) v2(84.2,60.96) v2(85.09,59.82) v2(85.09,58.67) v2(85.09,57.4) v2(85.09,56.26) v2(85.09,55.12) v2(85.22,64.39) v2(85.22,63.25) v2(85.22,62.1) v2(85.22,60.96) v2(86.36,117.98) v2(86.36,1.78) v2(87.12,59.82) v2(87.12,58.67) v2(87.12,57.4) v2(87.12,56.13) v2(87.12,55.12) v2(87.25,64.39) v2(87.25,63.25) v2(87.25,62.1) v2(87.25,60.96) v2(88.14,59.82) v2(88.14,58.67) v2(88.14,57.4) v2(88.14,56.13) v2(88.14,55.12) v2(88.27,64.39) v2(88.27,63.25) v2(88.27,62.1) v2(88.27,60.96) v2(89.66,60.33) v2(89.66,59.18) v2(89.66,57.91) v2(89.66,56.64) v2(89.79,62.61) v2(89.79,61.47) v2(90.55,60.33) v2(90.55,59.18) v2(90.55,57.91) v2(90.55,56.64) v2(90.68,62.61) v2(90.68,61.47) v2(91.44,117.98) v2(91.57,60.33) v2(91.57,59.18) v2(91.57,57.91) v2(91.57,56.64) v2(91.69,61.47) v2(92.71,1.78) v2(92.84,59.05) v2(92.84,57.91) v2(92.96,61.34) v2(92.96,60.2) v2(93.73,59.05) v2(93.73,57.91) v2(93.85,61.34) v2(93.85,60.2) v2(93.85,56.64) v2(93.98,62.48) v2(94.74,59.05) v2(94.74,57.91) v2(94.74,56.64) v2(94.87,62.48) v2(94.87,61.34) v2(94.87,60.2) v2(96.52,117.98) v2(96.9,59.05) v2(97.03,61.34) v2(97.03,60.2) v2(97.16,54.86) v2(97.28,63.75) v2(97.28,62.48) v2(97.79,59.05) v2(97.79,1.78) v2(97.92,61.34) v2(97.92,60.2) v2(98.17,62.48) v2(98.17,54.86) v2(98.3,63.75) v2(98.81,59.05) v2(98.93,61.34) v2(98.93,60.2) v2(99.06,62.48) v2(99.06,54.86) v2(99.19,63.75) v2(100.46,60.07) v2(100.46,58.93) v2(101.35,60.07) v2(101.35,58.93) v2(101.6,117.98) v2(101.85,54.86) v2(101.98,63.75) v2(102.36,60.07) v2(102.36,58.93) v2(102.74,54.86) v2(102.87,63.75) v2(102.87,1.78) v2(103.5,60.07) v2(103.5,58.93) v2(103.63,54.86) v2(103.76,63.75) v2(104.39,60.07) v2(104.39,58.93) v2(105.41,60.07) v2(105.41,58.93) v2(106.68,117.98) v2(107.95,1.78) v2(111.76,117.98) v2(113.03,1.78) v2(116.84,117.98) v2(116.84,112.9) v2(116.84,6.22) v2(118.11,1.78) v2(119.38,110.36) v2(119.38,8.76) v2(124.46,110.36) v2(124.46,105.28) v2(124.46,100.2) v2(124.46,95.12) v2(124.46,90.04) v2(124.46,84.96) v2(124.46,79.25) v2(124.46,74.17) v2(124.46,69.72) v2(124.46,64.64) v2(124.46,59.56) v2(124.46,54.48) v2(124.46,49.4) v2(124.46,44.32) v2(124.46,39.24) v2(124.46,34.16) v2(124.46,29.08) v2(124.46,24) v2(124.46,18.92) v2(124.46,13.84) v2(124.46,8.76)
GND_SIGNAL: length 280
  TOP w0.254: v1(36.96,59.31) 36.99,59.31 37,59.31 U1.6
  TOP w0.508: R37.1 v2(32.38,62.61)
  LAYER_5 w0.508: P3.3 63.66,112.55 62.87,111.76 62.87,107.19 ; S2.1 98.65,5.56 v2(98.68,5.59) ; S1.1 v2(109.86,108.59) ; 31.5,105.92 34.29,105.92 35.31,106.93 ; 31.5,105.92 31.5,69.09 ; 31.5,105.92 25.02,105.92 22.1,108.84 20.7,108.84 20.24,109.3 v2(20.24,109.45) ; 62.87,107.19 63.88,106.17 99.69,106.17 101.42,107.9 S1.4 ; 62.87,107.19 61.47,105.79 36.45,105.79 35.31,106.93 ; 35.31,106.93 P1.5 ; 32.77,48.64 32.38,48.26 32.38,5.84 34.92,3.3 87.81,3.3 S2.4
  BOTTOM w0.254: C16.2 67.31,112.23 67.56,112.48 P3.3 ; 33.69,56.64 v2(30.73,56.64) ; R3.2 38.48,54.78 R42.2
  BOTTOM w0.508: C20.1 98.65,5.56 v2(98.68,5.59) v2(98.68,8.13) 98.61,8.06 R58.2 ; C24.1 108.94,108.59 v2(109.86,108.59) v2(109.86,111) 109.79,111.06 R63.2 ; v2(20.24,109.45) 20.23,109.43 R43.2 ; S1.4 S1.1 ; S2.4 S2.1
  vias: v1(40.01,50.55) v2(36.58,52.07) v2(41.66,66.67)
VIN: length 351.8
  TOP w0.203: Q1.3 50.05,68.94 50.04,68.96 ; Q4.7 51.93,50.31 ; Q1.7 52.05,68.94 52.07,68.96 ; Q4.5 50.93,50.29 ; Q1.5 51.05,68.96 ; Q4.3 49.93,50.31
  LAYER_3 w0.508: v2(4.57,61.98) 3.05,60.45 3.05,16.76 16.51,3.3 100.97,3.3 102.11,4.45 102.11,8.38 99.95,10.54 v2(98.55,10.54) ; v2(109.88,113.59) 109.88,115.61 108.4,117.09 15.11,117.09 11.81,113.79 11.81,111.76 3.43,103.38 3.43,66.29 v2(4.57,65.15)
  LAYER_4 w0.254: E3.1 7.19,89.56 3.94,86.31 3.94,73.03 v2(12.83,64.14)
  BOTTOM w0.254: R2.1 43.31,68.45
  BOTTOM w0.508: v2(98.55,10.54) 98.53,10.56 R56.2 ; v2(109.88,113.59) 108.6,113.59 R62.1
  vias: v1(45.97,71.75) v1(45.97,71.25) v1(46.1,47.88) v1(46.1,47.37) v1(47.12,71.75) v1(47.12,71.25) v1(48.26,47.88) v1(48.26,47.37) v1(48.39,71.75) v1(48.39,71.25) v1(49.28,47.88) v1(49.28,47.37) v1(49.78,71.75) v1(49.78,71.25) v1(50.29,47.88) v1(50.29,47.37) v2(4.57,64.14) v2(4.57,62.99) v2(7.87,65.15) v2(7.87,64.14) v2(7.87,62.99) v2(7.87,61.98) v2(13.97,64.14) v2(15.11,64.14) v2(16.26,64.14) v2(17.27,64.14) v2(19.94,64.14) v2(21.08,64.14) v2(22.23,64.14) v2(23.37,64.14) v2(24.38,64.14)
EXTVCC: length 61.1
  TOP w0.254: 47.84,59.82 v1(45.21,59.82) 45.21,59.81 U1.26
  LAYER_3 w0.508: v2(48.26,27.3) 45.97,25.02 v2(45.97,8.26)
  LAYER_4 w0.254: 46.86,59.82 v1(45.21,59.82)
  LAYER_4 w0.508: v2(48.26,27.3) 48.26,40.01 47.12,41.15 47.12,59.56 46.86,59.82
  BOTTOM w0.254: C23.2 47.79,59.82 v1(45.21,59.82)
INTVCC: length 231.2
  TOP w0.254: U1.24 44.97,58.81 45.21,59.05 v2(45.72,59.05) 46.35,59.05 ; R45.2 v2(32.26,57.79)
  TOP w0.508: R38.2 v2(32.38,64.26) ; R22.2 v2(42.67,48.39)
  LAYER_3 w0.508: v2(45.72,59.05) 46.78,57.99 46.78,52.2 ; v2(30.73,55.12) 29.46,55.12 29.1,55.48 29.1,57.93 29.97,58.8 ; v2(18.75,109.42) 18.75,112.85 21.21,115.32 v2(31.5,115.32) 34.54,115.32 P1.1 35.31,114.81 36.66,116.16 66.97,116.16 67.56,115.57 P3.1 ; 46.78,52.2 38.73,52.2 33.15,57.79 v2(32.26,57.79) 30.99,57.79 29.97,58.8 ; 46.78,52.2 46.78,51.23 43.94,48.39 v2(42.67,48.39) ; 29.97,58.8 29.97,62.61 31.62,64.26 v2(32.38,64.26)
  LAYER_4 w0.508: v2(32.38,64.26) 30.61,66.04 30.61,101.98 29.84,102.74 21.34,102.74 18.73,105.35 18.73,109.4 v2(18.75,109.42) ; v2(42.67,48.39) 42.47,48.18 42.47,40.34 44.83,37.97 44.83,12.7 48.26,9.27 v2(57.15,9.27)
  BOTTOM w0.254: v2(30.73,55.12) 33.44,55.12 R41.2 ; v2(45.72,59.05) 46.1,58.67 47.66,58.67 C2.1 ; R36.2 32.38,57.91 v2(32.26,57.79) ; v2(57.15,9.27) R1.1
  BOTTOM w0.508: R5.1 18.69,109.47 v2(18.75,109.42) 18.73,109.4 R74.2 ; R71.1 43.31,49.02 v2(42.67,48.39) ; P1.1 35.16,114.41 R57.1
PGOOD1: length 80.3
  TOP w0.254: R68.1 32.3,60.92 v2(32.26,60.96) ; v1(42.2,63.37) 42.2,62.57 U1.34
  LAYER_3 w0.254: v1(42.2,63.37) 42.2,63.16 41.66,62.61 34.04,62.61 32.38,60.96 v2(32.26,60.96)
  LAYER_4 w0.254: v2(32.26,60.96) 30.61,60.96 29.08,62.48 29.08,100.08 28.32,100.84 20.57,100.84 15.87,105.54 E2.1
  BOTTOM w0.254: R5.2 14.64,111.34 E2.1
PGOOD2: length 77.7
  TOP w0.254: U1.17 42.2,54.62 v1(42.19,54.61) ; v2(32.13,59.18) 32.17,59.22 R68.2
  LAYER_3 w0.254: v1(42.19,54.61) 42.19,54.38 41.94,54.13 38.33,54.13 33.27,59.18 v2(32.13,59.18)
  LAYER_4 w0.254: v1(42.19,54.61) 42.19,54.51 40.64,52.96 40.64,39.75 43.05,37.34 43.05,9.27 45.72,6.6 52.9,6.6 E1.1
  BOTTOM w0.254: R1.2 52.99,6.52 E1.1
RUN1: length 123.9
  TOP w0.254: 36.84,60.31 v1(36.83,60.33) ; 36.84,60.31 35.56,60.31 34.95,60.92 R66.1 ; 36.84,60.31 U1.4
  LAYER_3 w0.254: E16.1 94.07,110.26 86.05,102.23 v1(35.05,102.23)
  LAYER_4 w0.254: v1(36.83,60.33) 35.56,61.59 35.56,66.04 33.15,68.45 33.15,100.33 v1(35.05,102.23)
  BOTTOM w0.508: S1.2 S1.5 95.56,111.07 E16.1
RUN2: length 128.2
  TOP w0.254: R66.2 34.92,59.29 35.45,59.82 v1(37.59,59.82) 37.6,59.81 U1.5
  LAYER_4 w0.254: E17.1 81.72,6.41 77.98,2.67 33.27,2.67 30.35,5.59 30.35,47.12 33.15,49.91 33.15,56.39 36.58,59.82 v1(37.59,59.82)
  BOTTOM w0.508: E17.1 83.21,8.05 S2.5 S2.2
SENSE1+: length 46.1
  TOP w0.254: U1.39 39.7,63.29 38.27,64.73 38.27,65.66 ; R34.1 37.85,67.31 37.72,67.44 37.72,69.51 R29.2
  LAYER_3 w0.254: v2(38.35,68.33) 38.35,68.71 40.39,70.74 40.39,72.26 41.53,73.41 67.44,73.41 69.09,71.75 69.09,69.22 v2(68.58,68.71)
  BOTTOM w0.254: R31.2 v2(68.58,68.71)
SENSE1-: length 49.1
  TOP w0.254: 36.66,65.66 36.66,65.32 39.2,62.78 U1.40 ; R34.2 36.96,67.31 37.21,67.56 37.21,69.51 R28.2
  LAYER_3 w0.254: v2(36.58,68.33) 37.21,68.33 39.88,70.99 39.88,72.52 41.27,73.91 67.69,73.91 69.6,72.01 69.6,69.22 v2(70.1,68.71)
  BOTTOM w0.254: R30.2 v2(70.1,68.71)
SENSE2+: length 61.9
  TOP w0.254: 34.67,54.19 35.22,54.74 38.48,54.74 39.7,55.96 U1.12 ; R24.2 v2(35.18,50.8) ; v2(31.88,54.23) 31.96,54.14 R33.1
  LAYER_3 w0.254: v2(68.71,50.42) 69.72,51.44 70.61,51.44 71.12,50.93 71.12,49.28 66.55,44.7 41.53,44.7 40.26,45.97 40.26,48.01 38.73,49.53 36.83,49.53 35.56,50.8 v2(35.18,50.8) 35.18,51.18 34.1,52.26 34.1,54.17 33.53,54.74 32.38,54.74 v2(31.88,54.23)
  BOTTOM w0.254: R26.2 v2(68.71,50.42)
SENSE2-: length 56.9
  TOP w0.254: v2(31.88,55.88) 31.92,55.84 R33.2 ; 34.76,55.88 34.76,55.66 35.18,55.25 38.23,55.25 39.2,56.22 U1.11 ; R25.2 v2(35.18,52.45)
  LAYER_3 w0.254: v2(31.88,55.88) 31.88,55.63 32.26,55.25 33.91,55.25 34.67,54.48 34.67,52.83 35.05,52.45 v2(35.18,52.45) 35.18,52.07 37.21,50.04 39.12,50.04 40.77,48.39 40.77,46.23 41.78,45.21 66.29,45.21 70.56,49.48 70.56,50.09 v2(70.23,50.42)
  BOTTOM w0.254: R27.2 v2(70.23,50.42)
UNNAMED_2_ADLTC7890_I172_BGDN1: length 1.4
  TOP w0.254: 45.82,61.31 U1.29
UNNAMED_2_ADLTC7890_I172_BGDN2: length 1.6
  TOP w0.254: U1.22 45.57,57.81 45.94,57.44
UNNAMED_2_ADLTC7890_I172_BGUP1: length 2
  TOP w0.254: U1.28 46.48,60.81
UNNAMED_2_ADLTC7890_I172_BGUP2: length 1.5
  TOP w0.254: 45.95,58.31 U1.23
UNNAMED_2_ADLTC7890_I172_BOOST1: length 2.3
  TOP w0.254: U1.30 45.3,61.81 v1(45.34,61.85)
  BOTTOM w0.254: C3.2 46.56,62.19 45.68,62.19 v1(45.34,61.85)
UNNAMED_2_ADLTC7890_I172_BOOST2: length 1.9
  TOP w0.254: v1(45.21,57.02) 45.21,57.15 45.05,57.31 U1.21
  BOTTOM w0.254: C4.1 45.49,56.74 v1(45.21,57.02)
UNNAMED_2_ADLTC7890_I172_DRVSET: length 7.2
  TOP w0.254: R45.1 36.45,57.79 v1(36.96,58.29) 36.98,58.31 U1.8
  BOTTOM w0.254: R3.1 39.37,57.15 38.23,58.29 v1(36.96,58.29)
UNNAMED_2_ADLTC7890_I172_DRVUV: length 3.3
  TOP w0.254: U1.7 38.44,58.8 v1(37.47,58.8)
  BOTTOM w0.254: v1(37.47,58.8) 36.2,58.8 35.56,59.44 R47.1
UNNAMED_2_ADLTC7890_I172_DTCA: length 4
  TOP w0.254: v1(37.26,56.77) 37.26,57.56 37.52,57.81 U1.9
  BOTTOM w0.254: 35.39,56.64 35.52,56.77 v1(37.26,56.77)
UNNAMED_2_ADLTC7890_I172_DTCB: length 3.4
  TOP w0.254: U1.10 38.23,57.09 v1(38.23,56.77)
  BOTTOM w0.254: v1(38.23,56.77) 38.23,55.88 37.17,54.82 R42.1
UNNAMED_2_ADLTC7890_I172_FREQ: length 3.9
  TOP w0.254: R37.2 35.39,62.1 37.72,62.1 38.01,61.81 U1.1
UNNAMED_2_ADLTC7890_I172_ILIM: length 3.3
  TOP w0.254: v1(41.71,55.22) 41.7,55.22 U1.16
  BOTTOM w0.254: R72.2 41.71,53.35 v1(41.71,55.22)
UNNAMED_2_ADLTC7890_I172_ITH1: length 4
  TOP w0.254: U1.37 40.7,63.61 v1(40.72,63.63)
  BOTTOM w0.254: 37.92,63.98 38.27,63.63 v1(40.72,63.63)
UNNAMED_2_ADLTC7890_I172_ITH2: length 3.9
  TOP w0.254: U1.14 40.7,55.05 40.13,54.48 40.13,52.87 40.12,52.86
UNNAMED_2_ADLTC7890_I172_MODE: length 57.1
  TOP w0.254: v1(36.83,61.34) 37.85,61.34 37.87,61.31 U1.2
  LAYER_3 w0.254: v1(36.04,103.25) 37.31,104.52 P1.6
  LAYER_4 w0.254: v1(36.04,103.25) 36.04,100.93 34.29,99.19 34.29,68.71 36.7,66.29 36.7,61.47 v1(36.83,61.34)
  BOTTOM w0.508: P1.6 P1.4 P1.2
UNNAMED_2_ADLTC7890_I172_SW1: length 10.5
  TOP w0.203: 51.56,68.45 51.55,68.46 Q1.6 ; 50.55,68.45 50.55,68.46 Q1.4 ; 50.04,64.9 50.05,64.88 Q2.3 ; Q2.7 52.05,64.88 52.07,64.9 ; Q2.5 51.05,64.9
  TOP w0.254: L1.1 66.36,66.1 v2(66.42,66.04) ; v1(52.07,65.79) 52.05,65.77 ; v1(44.2,62.99) 44.13,62.99 U1.31 ; v1(50.04,65.79) 50.05,65.77
  LAYER_2 w0.254: v1(49.53,67.44) 49.02,67.95
  BOTTOM w0.254: R31.1 66.46,66.08 v2(66.42,66.04) ; C3.1 45.06,63.84 44.31,63.09 44.3,63.09 v1(44.2,62.99) v1(44.2,63.37)
  vias: v1(51.56,66.55) v1(51.56,66.17) v1(52.07,66.55) v1(52.07,66.17) v2(57.78,67.06) v2(57.78,65.79) v2(57.78,64.52) v2(59.05,67.06) v2(59.05,65.79) v2(59.05,64.52) v2(60.33,67.06) v2(60.33,65.79) v2(60.33,64.52)
UNNAMED_2_ADLTC7890_I172_SW2: length 13.1
  TOP w0.203: Q4.4 50.43,50.79 50.42,50.8 ; Q4.6 51.43,50.79 51.44,50.8
  TOP w0.254: 49.91,54.23 49.92,54.24 Q3.3 ; v2(66.67,52.96) 66.61,53.02 L2.2 ; Q3.5 50.92,54.23 50.93,54.23 ; U1.20 43.7,55.87 v1(43.94,55.63) v1(43.94,55.12) ; v1(49.43,49.35) 49.43,49.35 Q4.2 ; Q3.7 51.92,54.25 51.94,54.23
  LAYER_2 w0.254: v1(49.4,51.94) 49.4,49.38 v1(49.43,49.35)
  BOTTOM w0.254: v1(43.94,55.63) 43.94,55.25 44.7,54.48 45.45,54.48 C4.2 ; R26.1 68.62,52.96 v2(66.67,52.96)
  vias: v1(51.18,52.96) v1(51.18,52.58) v1(52.2,52.93) v1(52.2,52.55) v2(58.47,54.48) v2(58.47,53.21) v2(58.47,51.94) v2(59.74,54.48) v2(59.74,53.21) v2(59.74,51.94) v2(61.01,54.48) v2(61.01,53.21) v2(61.01,51.94)
UNNAMED_2_ADLTC7890_I172_TGDN1: length 2.2
  TOP w0.254: 43.2,64.79 U1.32
UNNAMED_2_ADLTC7890_I172_TGDN2: length 3.1
  TOP w0.254: 43.65,53.68 43.2,54.13 U1.19
UNNAMED_2_ADLTC7890_I172_TGUP1: length 2.8
  TOP w0.254: U1.33 42.7,65.35
UNNAMED_2_ADLTC7890_I172_TGUP2: length 4.1
  TOP w0.254: 43.15,52.6 42.7,53.06 U1.18
UNNAMED_2_ADLTC7890_I172_VIN: length 9.5
  TOP w0.254: v1(45.72,60.33) 45.73,60.31 U1.27
  LAYER_3 w0.254: v1(44.45,64.39) 45.72,64.39 46.48,63.63 46.48,61.09 v1(45.72,60.33)
  BOTTOM w0.254: v1(45.72,60.33) 46.06,60.67 C25.1 ; v1(44.45,64.39) 44.36,64.39 R2.2
UNNAMED_2_ADLTC7890_I172_VPRG1: length 66.1
  TOP w0.254: v1(41.7,63.63) U1.35
  LAYER_4 w0.254: v2(20.22,105.77) 21.34,104.65 38.61,104.65 42.16,101.09 42.16,79.88 40.39,78.11 40.39,65.28 41.7,63.96 v1(41.7,63.63)
  BOTTOM w0.254: R74.1 R43.1 20.23,105.77 v2(20.22,105.77)
UNNAMED_2_CAP_I201_N1: length 84.5
  TOP w0.254: U1.3 37.61,60.81 v1(37.59,60.83)
  LAYER_4 w0.254: v2(60.33,109.73) 60.33,107.59 58.29,105.56 47.52,105.56 44.7,102.74 44.7,70.74 46.1,69.34 46.1,63.5 44.7,62.1 38.61,62.1 38.15,61.65 38.15,61.01 37.97,60.83 v1(37.59,60.83)
  BOTTOM w0.254: 62.13,110.55 P3.5 P3.6 ; 62.13,110.55 C16.1 ; 62.13,110.55 60.35,110.55 R49.2 v2(60.33,109.73)
  BOTTOM w0.508: P3.6 P3.4 P3.2
UNNAMED_2_CAP_I211_N1: length 69.7
  TOP w0.254: U1.36 v1(41.2,63.34)
  LAYER_4 w0.254: v1(41.2,63.34) 41.93,62.61 42.93,62.61 43.43,63.12 43.43,103.5 41.18,105.76 22.56,105.76 v2(22.53,105.79)
  BOTTOM w0.254: v2(22.53,105.79) 22.53,105.79 R52.2 ; v1(41.2,63.34) 41.2,63.95 40.04,65.11 R53.1
UNNAMED_2_CAP_I223_N2: length 6.1
  BOTTOM w0.508: S1.6 S1.3 R62.2
UNNAMED_2_CAP_I271_N2: length 6.2
  BOTTOM w0.508: S2.6 S2.3 96.2,10.54 R56.1
UNNAMED_2_CAP_I275_N1: length 96.7
  TOP w0.254: U1.15 41.2,54.66 v1(41.15,54.61)
  LAYER_4 w0.254: v1(41.15,54.61) 33.15,46.61 33.15,5.72 34.67,4.19 67.56,4.19 70.1,6.73 v2(70.1,7.75)
  BOTTOM w0.254: 40.11,53.25 C15.1 40.11,53.57 v1(41.15,54.61) ; R50.1 70.19,7.66 v2(70.1,7.75)
UNNAMED_2_CN6PODDEVEN_I358_N3: length 3.8
  BOTTOM w0.508: P1.3 35.15,112.71 R57.2
UNNAMED_2_CNBNC5P_I457_CNTR: length 5.3
  LAYER_4 w0.254: v1(48.9,69.34) 51.05,67.18 v1(51.69,67.18)
  BOTTOM w0.203: v1(48.9,69.34) 48.01,69.34 R10.2
  BOTTOM w0.254: J10.1 v1(51.69,67.18)
UNNAMED_2_CNBNC5P_I458_CNTR: length 5.2
  LAYER_4 w0.254: v1(51.18,52.07) 51.18,51.69 50.29,50.8 v1(48.77,50.8)
  BOTTOM w0.203: v1(48.77,50.8) 47.91,50.8 R39.2
  BOTTOM w0.254: v1(51.18,52.07) 51.69,51.56 J11.1
UNNAMED_2_CNTP1P_I84_N1: length 3.9
  BOTTOM w0.254: R49.1 56.9,112.23 E10.1
UNNAMED_2_CNTP1P_I85_N1: length 4.7
  BOTTOM w0.254: R52.1 22.53,111.29 E11.1
UNNAMED_2_CNTP1P_I261_N1: length 5.3
  BOTTOM w0.254: E12.1 41.99,6.56 R61.2
UNNAMED_2_CNTP1P_I280_N1: length 3.5
  BOTTOM w0.254: E9.1 68.37,6.6 R50.2
UNNAMED_2_IND_I133_N2: length 63.7
  TOP w0.254: L1.2 72.07,66.1 v2(72.01,66.17) ; RS1.2 80.46,67.95 v2(81.79,67.95) ; R29.1 v2(38.35,72.64)
  LAYER_3 w0.254: v2(38.35,72.64) 37.97,72.64 37.72,72.9 37.72,74.04 38.61,74.93 43.05,74.93 46.35,78.23 78.36,78.23 82.8,73.79 82.8,68.58 82.17,67.95 v2(81.79,67.95)
  BOTTOM w0.254: v2(72.01,66.17) 71.92,66.08 R30.1
UNNAMED_2_IND_I299_N1: length 70.9
  TOP w0.254: RS2.1 v2(81.79,51.31) ; R24.1 v2(31.75,50.8) ; L2.1 72.07,53.02 v2(72.01,52.96)
  LAYER_3 w0.254: v2(81.79,51.31) 82.3,51.31 82.8,50.8 82.8,45.3 79.04,41.53 42.8,41.53 38.86,45.47 38.86,46.99 37.97,47.88 34.29,47.88 31.75,50.42 v2(31.75,50.8)
  BOTTOM w0.254: v2(72.01,52.96) 71.92,53.05 R27.1
UNNAMED_2_NCTESTPAD_I479_N1: length 0.9
  BOTTOM w0.254: TP2.1 47.88,67.77 48.01,67.89 R10.1
  vias: v1(48.51,68.45) v1(48.51,68.07)
UNNAMED_2_NCTESTPAD_I480_N1:
  vias: v1(48.54,64.34) v1(48.54,63.98)
UNNAMED_2_NCTESTPAD_I481_N1:
  vias: v1(48.51,54.1) v1(48.51,53.72)
UNNAMED_2_NCTESTPAD_I482_N1: length 1
  BOTTOM w0.254: R39.1 47.88,49.53 TP3.1
  vias: v1(48.51,50.04) v1(48.51,49.66)
VFB1: length 3.4
  TOP w0.254: 39.97,65.91 40.2,65.68 U1.38
VFB2: length 4.6
  TOP w0.254: U1.13 40.2,55.57 38.35,53.72 38.35,52.74 38.39,52.71
VOSP1: length 74.1
  LAYER_3 w0.305: E6.1 96.74,80.26 46.1,80.26 v2(42.67,76.84)
  LAYER_4 w0.305: v2(41.78,71.25) 41.78,71.37 42.67,72.26 v2(42.67,76.84)
  BOTTOM w0.254: R17.1 103.04,90.29 E6.1
VOSP2: length 77.7
  LAYER_3 w0.254: v2(36.7,46.1) 36.7,43.69 40.89,39.5 96.9,39.5 103.04,33.36 E5.1
  BOTTOM w0.254: R12.1 103,32.52 E5.1
VOUT1: length 243.1
  TOP w0.254: v2(84.96,67.95) 86.42,67.95 RS1.1 ; R28.1 v2(36.58,72.64)
  LAYER_3 w0.254: v2(84.96,67.95) 84.07,67.95 83.44,68.58 83.44,73.87 78.57,78.74 46.14,78.74 42.84,75.44 38.23,75.44 37.21,74.42 37.21,72.9 36.96,72.64 v2(36.58,72.64)
  LAYER_3 w0.508: v2(43.56,5.72) 43.56,5.21 44.32,4.45 48.13,4.45 49.15,5.46 49.15,12.07 53.85,16.76 119.51,16.76 122.68,19.94 122.68,56.13 119.25,59.56 111.38,59.56 105.03,65.91 v2(103.76,65.91)
  LAYER_4 w0.305: v2(92.96,67.82) 92.84,67.95 92.84,83.82 102.11,93.09 v2(103,93.09)
  BOTTOM w0.254: v2(43.56,5.72) R59.1 ; v2(103,93.09) R17.2
  vias: v2(88.52,71.63) v2(88.52,70.36) v2(88.52,69.09) v2(88.77,66.93) v2(88.77,66.04) v2(89.53,71.63) v2(89.53,70.36) v2(89.53,69.09) v2(89.92,67.82) v2(90.42,71.63) v2(90.42,70.36) v2(90.42,69.09) v2(90.93,67.82) v2(93.98,67.82) v2(94.87,67.82) v2(97.16,67.82) v2(97.28,65.91) v2(98.04,67.82) v2(98.3,65.91) v2(98.93,67.82) v2(99.19,65.91) v2(101.22,75.18) v2(101.22,73.91) v2(101.22,72.64) v2(101.22,71.37) v2(101.22,70.1) v2(101.98,65.91) v2(102.23,75.18) v2(102.23,73.91) v2(102.23,72.64) v2(102.23,71.37) v2(102.23,70.1) v2(102.87,65.91) v2(103.12,75.18) v2(103.12,73.91) v2(103.12,72.64) v2(103.12,71.37) v2(103.12,70.1) v2(106.05,75.06) v2(106.05,73.79) v2(106.05,72.52) v2(106.05,71.25) v2(106.05,69.98) v2(106.93,75.06) v2(106.93,73.79) v2(106.93,72.52) v2(106.93,71.25) v2(106.93,69.98) v2(107.82,75.06) v2(107.82,73.79) v2(107.82,72.52) v2(107.82,71.25) v2(107.82,69.98)
VOUT2: length 233.6
  TOP w0.254: R25.1 v2(31.75,52.45) ; RS2.2 v2(85.09,51.31)
  LAYER_3 w0.254: v2(85.09,51.31) 83.95,51.31 83.31,50.67 83.31,45.08 79.25,41.02 42.59,41.02 38.35,45.26 38.35,46.78 37.76,47.37 34.04,47.37 30.99,50.42 30.99,51.69 v2(31.75,52.45)
  LAYER_3 w0.508: v2(103.63,52.96) 105.66,52.96 112.01,46.61 117.6,46.61 120.52,43.69 120.52,22.73 117.09,19.3 50.55,19.3 47.88,16.64 47.88,6.6 46.99,5.72 v2(44.96,5.72)
  LAYER_4 w0.254: v2(103,25.78) 102.36,25.78 92.58,35.56 92.58,50.8 v2(92.96,51.18)
  BOTTOM w0.254: v2(103,25.78) R12.2 ; v2(44.96,5.72) R60.1
  vias: v2(89.15,51.18) v2(89.15,50.04) v2(89.15,48.9) v2(89.15,47.88) v2(89.15,46.74) v2(90.68,51.18) v2(90.68,50.04) v2(90.68,48.9) v2(90.68,47.88) v2(90.68,46.74) v2(93.85,51.18) v2(94.61,51.18) v2(97.16,52.96) v2(97.28,49.15) v2(98.17,52.96) v2(98.3,49.15) v2(99.06,52.96) v2(99.19,49.15) v2(101.85,52.96) v2(101.98,49.28) v2(101.98,48.01) v2(101.98,46.74) v2(101.98,45.47) v2(101.98,44.2) v2(102.74,52.96) v2(103,49.28) v2(103,48.01) v2(103,46.74) v2(103,45.47) v2(103,44.2) v2(103.89,49.28) v2(103.89,48.01) v2(103.89,46.74) v2(103.89,45.47) v2(103.89,44.2) v2(105.28,48.39) v2(105.28,47.12) v2(105.28,45.85) v2(105.28,44.58) v2(105.28,43.31) v2(106.17,48.39) v2(106.17,47.12) v2(106.17,45.85) v2(106.17,44.58) v2(106.17,43.31) v2(107.06,48.39) v2(107.06,47.12) v2(107.06,45.85) v2(107.06,44.58) v2(107.06,43.31)

## Copper pours and planes (outline as drawn; the poured copper is in the pictures)
GND_POWER on TOP: 1.02,118.36 1.02,1.02 125.98,1.02 125.98,118.36 ; 6 cut-outs
GND_POWER on BOTTOM: 1.02,118.36 1.02,1.02 125.86,1.02 125.86,118.36 ; 6 cut-outs
GND_POWER on LAYER_2, LAYER_5: 1.02,118.36 1.02,1.02 125.86,1.02 125.86,118.36 ; 6 cut-outs
GND_POWER on LAYER_3: 1.02,118.36 1.02,1.02 125.73,1.02 125.73,118.36 ; 6 cut-outs
GND_POWER on LAYER_4: 1.02,118.36 1.02,1.02 125.86,1.02 125.86,118.36 ; 5 cut-outs
GND_SIGNAL on TOP (solid shape): 37.47,50.8 36.07,50.8 36.07,53.34 37.47,53.34
GND_SIGNAL on TOP: 31.88,63.12 31.88,61.98 33.66,61.98 33.66,63.12
GND_SIGNAL on TOP: 39.62,51.82 39.62,49.28 40.64,49.28 40.64,51.82
GND_SIGNAL on TOP, BOTTOM: 41.02,68.07 41.02,65.41 42.16,65.41 42.16,68.07
GND_SIGNAL on BOTTOM: 31.88,63.12 31.88,61.98 33.27,61.98 33.27,60.58 34.16,60.58 34.16,61.98 36.83,61.98 36.83,63.12
GND_SIGNAL on BOTTOM: 33.27,57.02 33.27,55.88 34.29,55.88 34.29,57.02
GND_SIGNAL on BOTTOM: 36.2,53.98 36.2,51.56 37.72,51.56 37.72,53.98
GND_SIGNAL on BOTTOM: 37.97,52.2 42.16,52.2 42.16,50.17 37.97,50.17
GND_SIGNAL on LAYER_5: 29.64,70.1 29.64,47.93 48.77,47.93 48.77,70.1
VIN on TOP: 25.78,44.96 25.78,41.15 46.1,41.15 46.1,44.83 55.88,44.83 55.88,49.28 52.07,49.28 52.07,50.42 49.66,50.42 49.66,51.18 42.55,51.18 42.55,47.24 37.47,47.24 37.47,44.96
VIN on TOP: 3.17,85.47 44.96,85.47 44.96,74.3 54.86,74.3 54.86,69.85 52.32,69.85 52.32,68.83 49.15,68.83 49.15,66.93 37.47,66.93 37.47,44.2 25.78,44.2 25.78,60.07 3.17,60.07
VIN on BOTTOM: 56.01,73.91 56.01,70.1 48.77,70.1 48.77,68.33 39.12,68.33 39.12,63.88 35.81,63.88 35.81,53.21 48.77,53.21 48.77,49.15 55.88,49.15 55.88,45.21 26.54,45.21 26.54,60.07 2.92,60.07 2.92,79.5 8.89,85.47 42.67,85.47 42.67,73.91
EXTVCC on TOP: 46.86,60.07 48.51,60.07 48.51,59.05 47.37,59.05 46.74,59.69 46.74,59.94
EXTVCC on BOTTOM: 41.02,8.89 41.02,7.62 46.35,7.62 46.35,8.89
INTVCC on TOP: 43.94,58.67 43.94,59.44 46.61,59.44 47.24,58.8 48.51,58.8 48.51,57.79 47.5,57.79 46.61,58.67
INTVCC on BOTTOM: 33.21,60.01 33.21,57.4 34.16,57.4 34.16,60.01
